# EAGLE board power electronicsV3.1 (EAGLE 9.6.2)
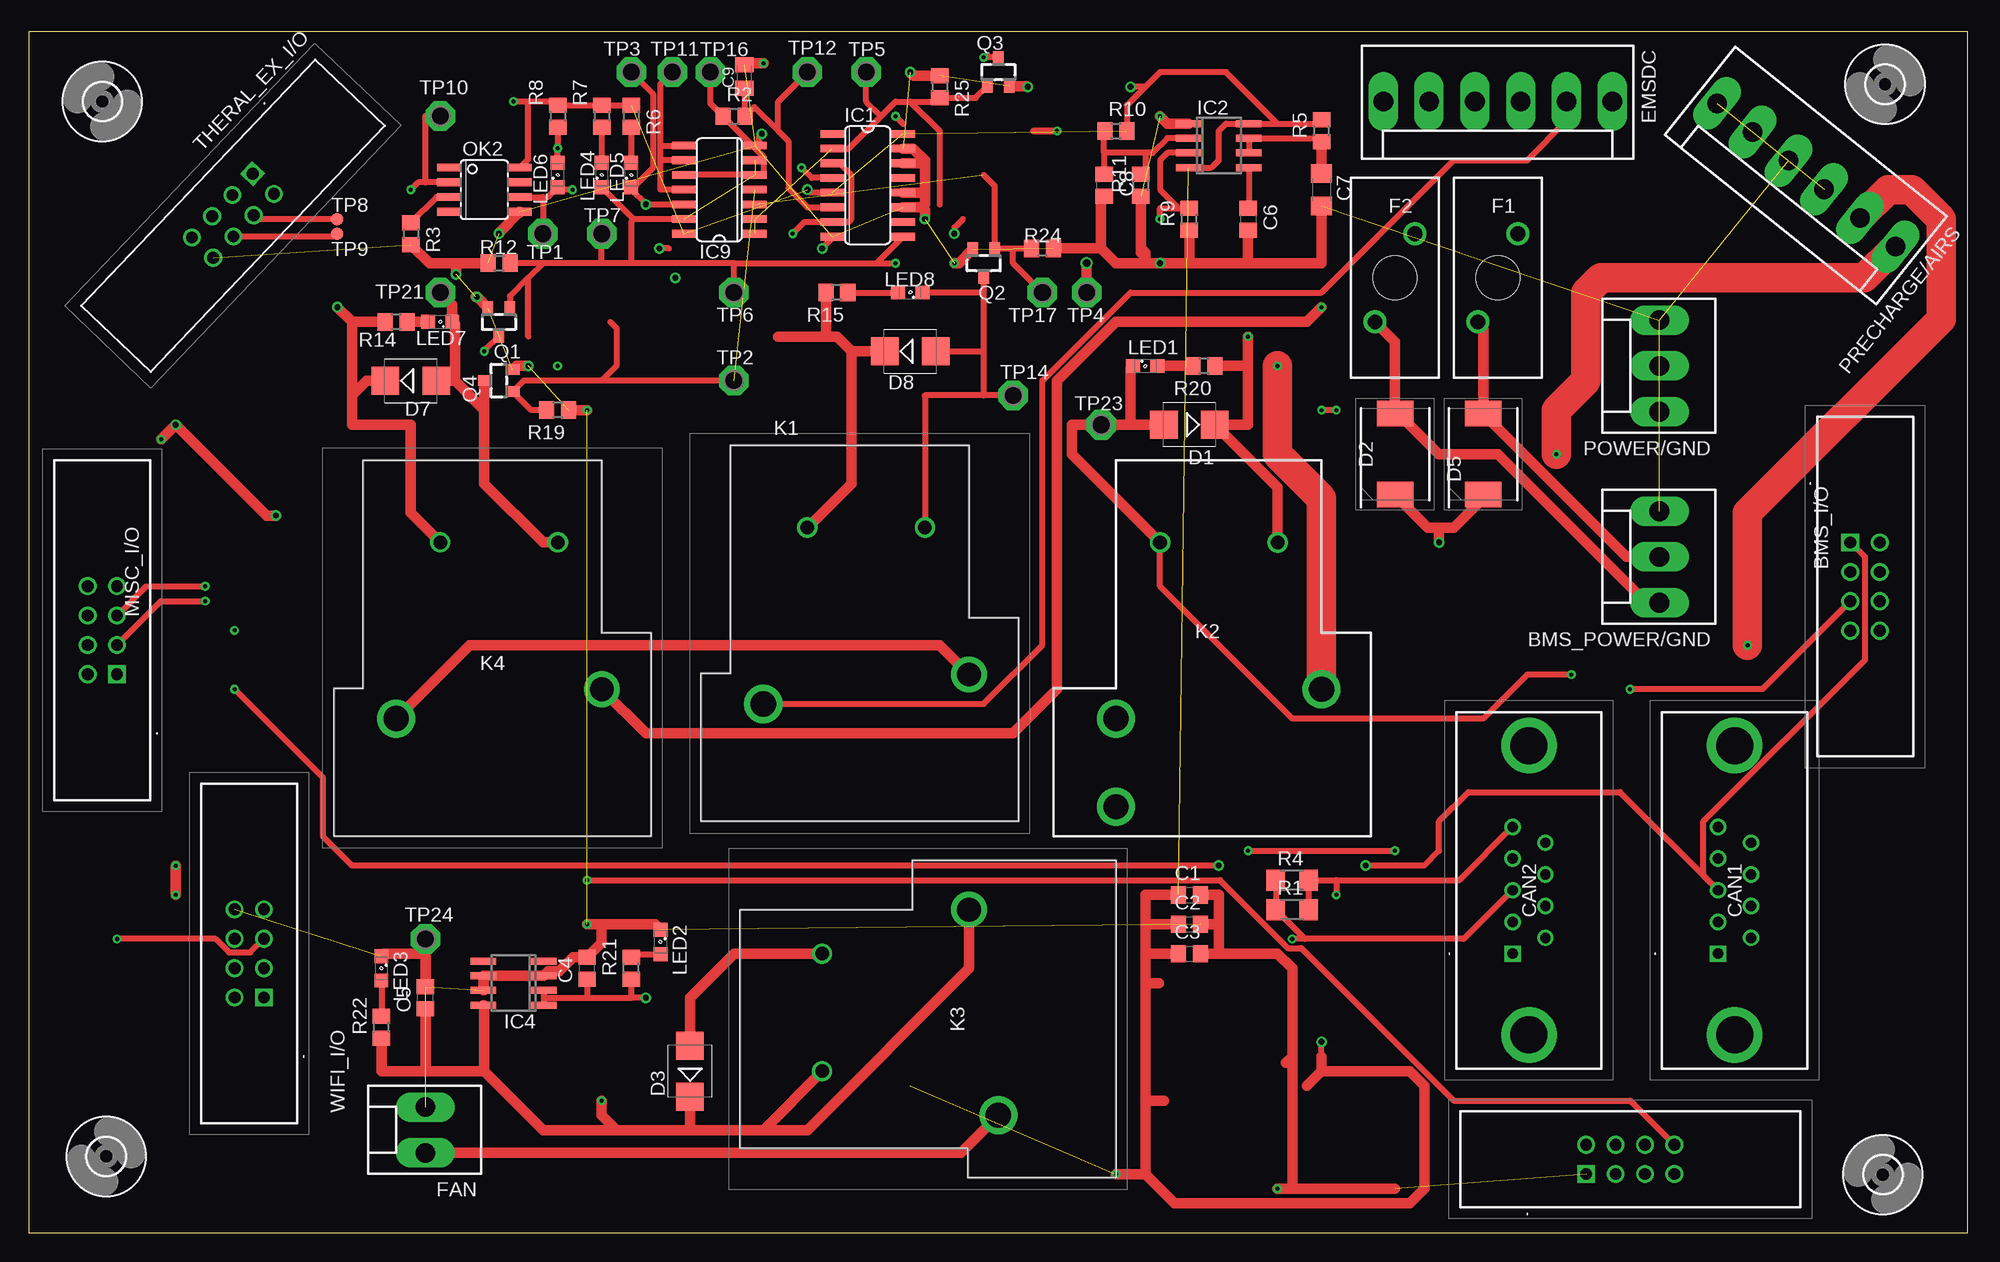
[diagram p0: board, top side]
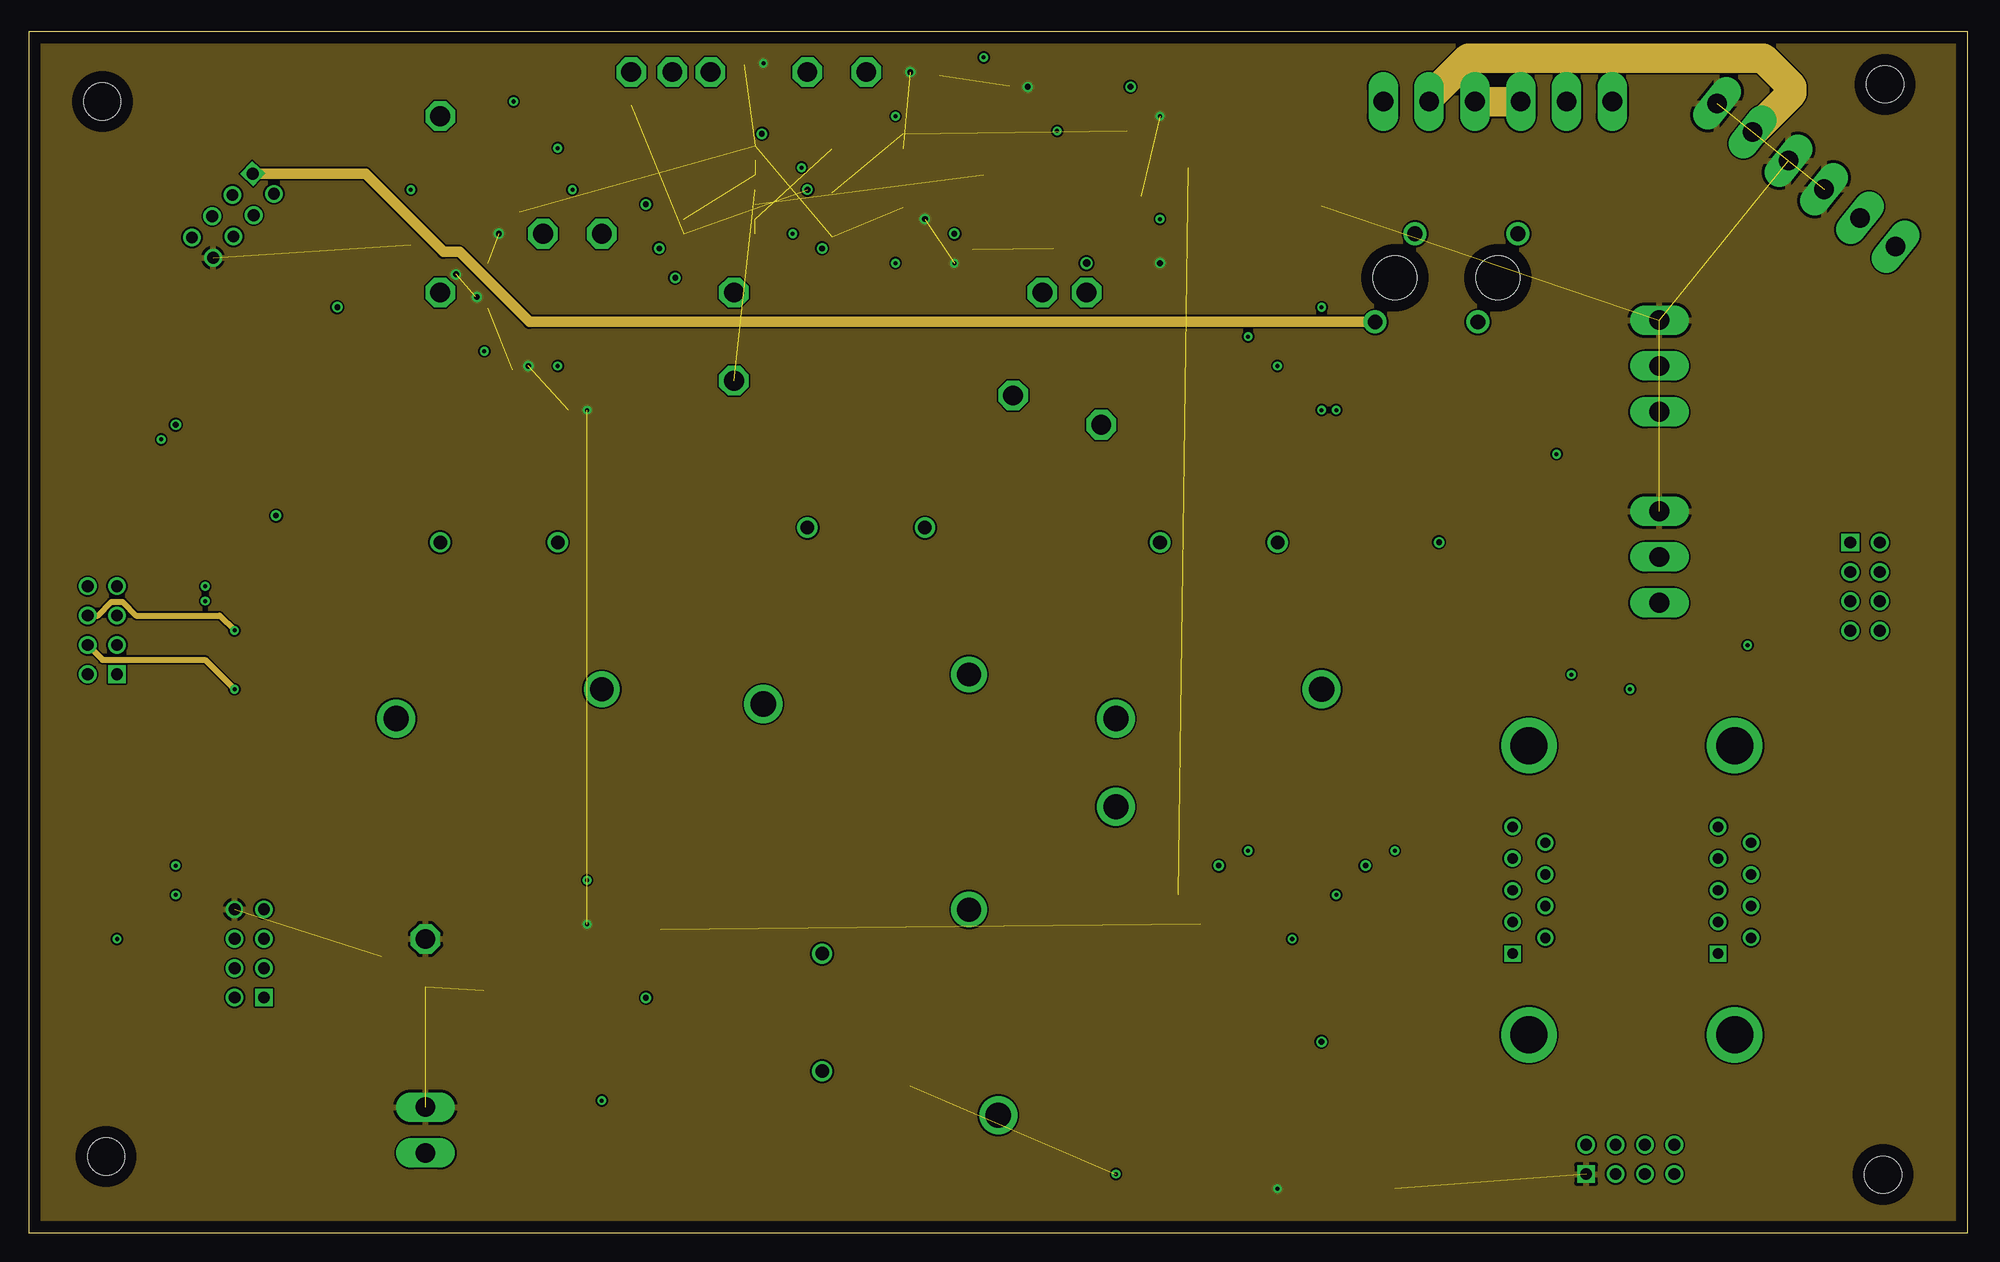
[diagram p1: board, inner layer Route2]
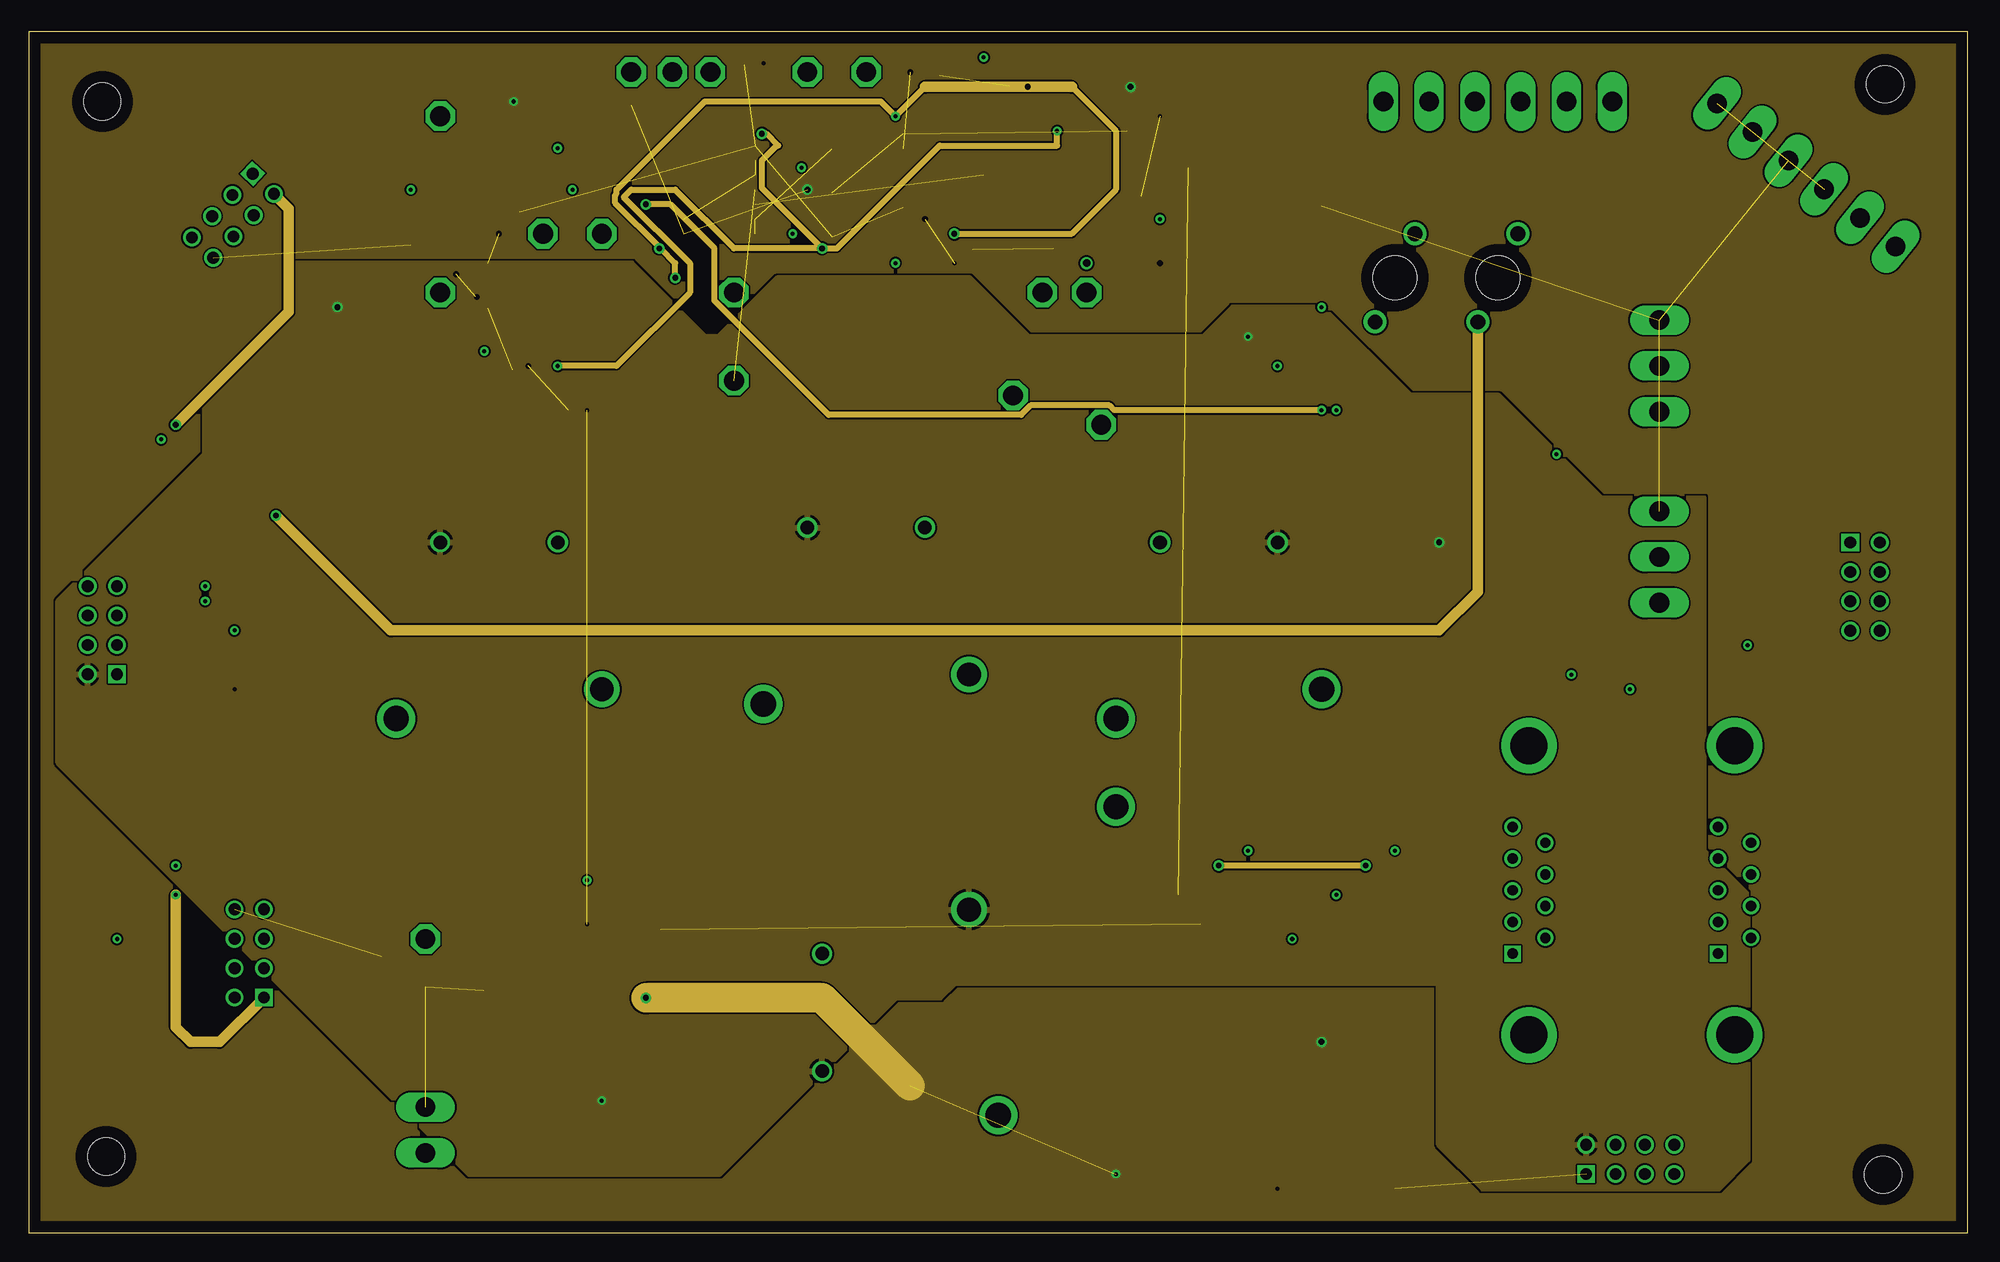
[diagram p2: board, inner layer Route15]
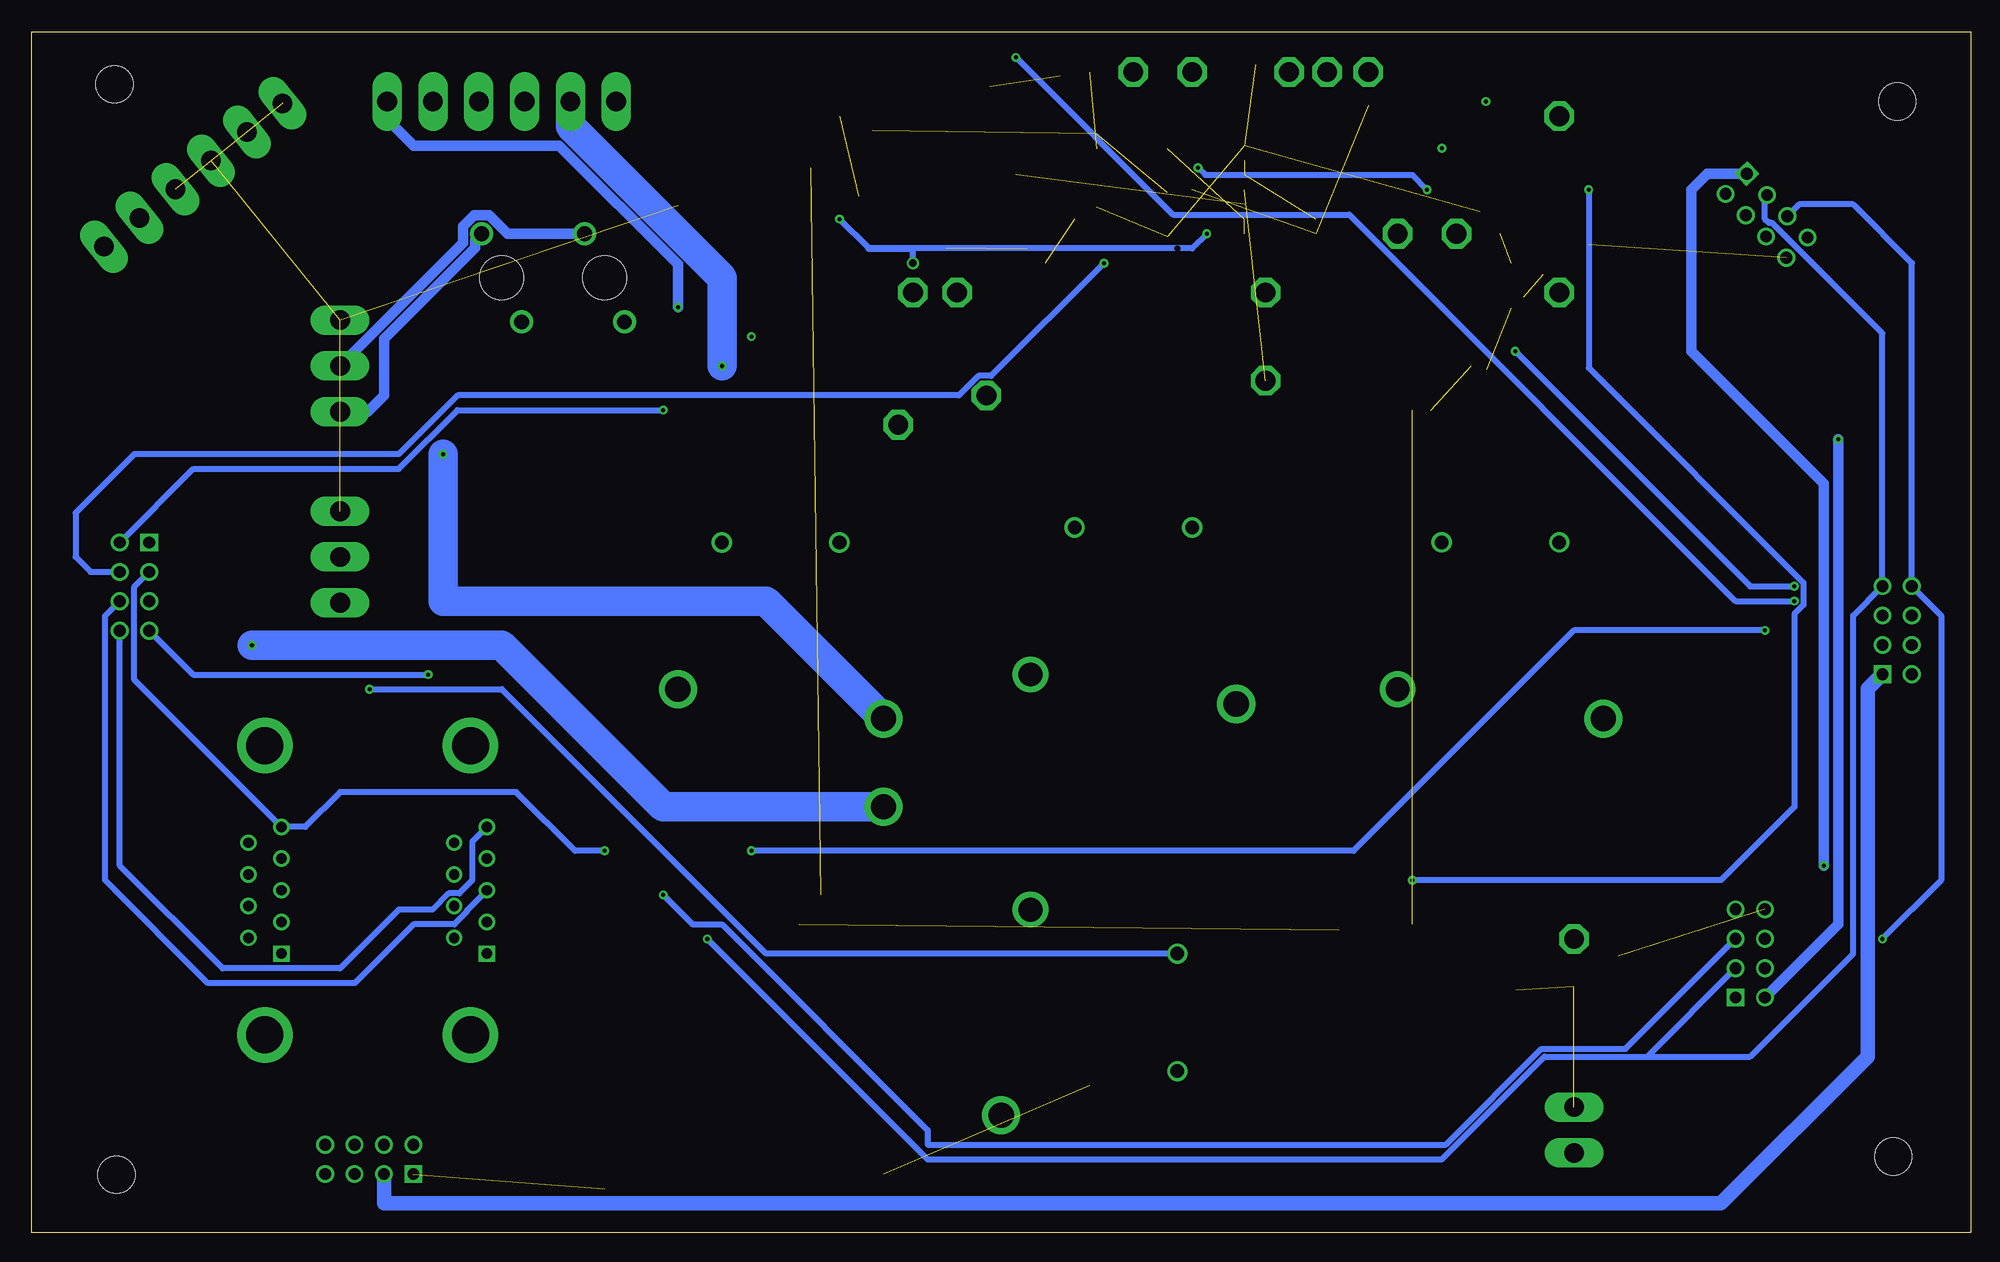
[diagram p3: board, bottom side, seen from below]

Size 167.62 x 103.81 mm. Coordinates in mm from the lower left corner, seen from the top.
Outline: 0,0 167.62,0 167.62,103.81 0,103.81 0,0
Copper layers ([2:[15:1+2*15+16]]): Top 0.035mm / dielectric 1.5mm / Route2 0.035mm / dielectric 0.15mm / Route15 0.035mm / dielectric 0.2mm / Bottom 0.035mm
Design rules "default *": minimum track width 6mil, minimum drill 0.35mm, track to track 6mil, track to pad 6mil, pad to pad 6mil, via to via 6mil, smd to smd 6mil, copper to edge 40mil, drill to drill 6mil, minimum pad ring 10mil, minimum via ring 8mil, stop-mask expansion 4mil, vias tented up to drill 0mil, thermal gap 10mil
Net classes: 0 default: width 0.508 mm; 1 GND: width 0.889 mm; 2 EMSDC: width 2.54 mm; 3 power: width 0.889 mm

## Footprints (pad centres in the part's own frame; a part is rotated, then mirrored left to right if it is on the bottom)
T816108A1S102CEU = drill 1.02 pad 1.53 square: 1 5.1,0 | drill 1.02 pad 1.53: 2 5.1,2.54; 3 7.64,0; 4 7.64,2.54; 5 10.18,0; 6 10.18,2.54; 7 12.72,0; 8 12.72,2.54
KK-156-3 = drill 1.7 pad 2.184 long: 1 -3.96,0; 2 0,0; 3 3.96,0
C0805 = smd 1.3 x 1.5: 1 -0.95,0; 2 0.95,0
C1206 = smd 1.6 x 1.8: 1 -1.4,0; 2 1.4,0
C0805K = smd 1.3 x 1.6: 1 -1,0; 2 1,0
LD09P24A4GV00LF = drill 0.9 pad 1.4 square: 1 0,0 | drill 0.9 pad 1.4: 2 2.74,0; 3 5.48,0; 4 8.22,0; 5 10.96,0; 6 1.37,-2.84; 7 4.11,-2.84; 8 6.85,-2.84; 9 9.59,-2.84 | drill 3.2 pad 4.8: MH1 -7.015,-1.42; MH2 17.975,-1.42
SMB = smd 2.4 x 2.4: A 2.2,0; C -2.2,0
DIOM7959X262N = smd 2.2 x 3.15: 1 -3.5,0; 2 3.5,0
KK-156-6 = drill 1.7 pad 2.184 long: 1 -9.9,0; 2 -5.94,0; 3 -1.98,0; 4 1.98,0; 5 5.94,0; 6 9.9,0
01530008 = drill 1.27 pad 2: 1 1.727,3.81; 2 -1.727,-3.81 | hole 3.785: 0,0
KK-156-2 = drill 1.7 pad 2.184 long: 1 -1.98,0; 2 1.98,0
3,2 = hole 3.2: 0,0
SO16 = smd 0.66 x 2.032: 1 -4.445,-3.073; 2 -3.175,-3.073; 3 -1.905,-3.073; 4 -0.635,-3.073; 5 0.635,-3.073; 6 1.905,-3.073; 7 3.175,-3.073; 8 4.445,-3.073; 9 4.445,3.073; 10 3.175,3.073; 11 1.905,3.073; 12 0.635,3.073; 13 -0.635,3.073; 14 -1.905,3.073; 15 -3.175,3.073; 16 -4.445,3.073
SO08 = smd 0.6 x 2.2: 1 -1.905,-2.6; 2 -0.635,-2.6; 3 0.635,-2.6; 4 1.905,-2.6; 5 1.905,2.6; 6 0.635,2.6; 7 -0.635,2.6; 8 -1.905,2.6
SOIC8 = smd 0.6 x 2.2: 1 -1.905,-2.6; 2 -0.635,-2.6; 3 0.635,-2.6; 4 1.905,-2.6; 5 1.905,2.6; 6 0.635,2.6; 7 -0.635,2.6; 8 -1.905,2.6
SO14 = smd 0.66 x 2.032: 1 -3.81,-3.073; 2 -2.54,-3.073; 3 -1.27,-3.073; 4 0,-3.073; 5 1.27,-3.073; 6 2.54,-3.073; 7 3.81,-3.073; 8 3.81,3.073; 9 2.54,3.073; 10 1.27,3.073; 11 0,3.073; 12 -1.27,3.073; 13 -2.54,3.073; 14 -3.81,3.073
T9AS1D1248T9A = drill 1.17 pad 1.755: 1 0,0; 2 -10.16,0 | drill 2.06 pad 3.09: 3 -13.97,12.7 | drill 2.19 pad 3.3: 4 3.81,15.24
T9AS1D12 = drill 2.19 pad 3.29: 1 -8.89,12.7; 2 8.89,15.24; 3 8.89,22.86 | drill 1.17 pad 1.77: 4 -5.08,0; 5 5.08,0
SML0805 = smd 1.2 x 1.2: A 1.05,0; C -1.05,0
SOIC08 = smd 0.66 x 2.032: 1 -1.905,-3.073; 2 -0.635,-3.073; 3 0.635,-3.073; 4 1.905,-3.073; 5 1.905,3.073; 6 0.635,3.073; 7 -0.635,3.073; 8 -1.905,3.073
SOT23 = smd 0.9 x 1.2: 1 -0.95,-1.2; 2 0.95,-1.2; 3 0,1.2
R1206 = smd 1.6 x 1.803: 1 -1.422,0; 2 1.422,0
R0805 = smd 1.3 x 1.5: 1 -0.95,0; 2 0.95,0
P1-17 = drill 1.702 pad 2.54 octagon: TP 0,0
TP11R = smd 1.1 x 1.1: TP 0,0

## Placement (x,y rotation side)
BMS_I/O  T816108A1S102CEU  [T816108A1S102CEU]  157.48,64.77 270 top
BMS_POWER/GND  [KK-156-3]  140.97,58.42 90 top
C1  0.1uF  [C0805]  100.33,29.21 0 top
C2  0.1uF  [C0805]  100.33,26.67 0 top
C3  0.1uF  [C0805]  100.33,24.13 0 top
C4  3.3uF  [C0805]  48.26,22.86 90 top
C5  1uF  [C0805]  34.29,20.32 90 top
C6  0.1uF  [C0805]  105.41,87.63 270 top
C7  22uF  [C1206]  111.76,90.17 270 top
C8  10uF  [C0805]  92.96,90.55 270 top
C9  DNP  [C0805K]  61.85,99.95 90 top
CAN1  LD09P24A4GV00LF  [LD09P24A4GV00LF]  146.05,24.13 90 top
CAN2  LD09P24A4GV00LF  [LD09P24A4GV00LF]  128.27,24.13 90 top
D1  ES2D  [SMB]  100.33,69.85 180 top
D2  VS-30BQ100-M3_9AT  [DIOM7959X262N]  118.11,67.31 90 top
D3  ES2D  [SMB]  57.15,13.97 90 top
D5  VS-30BQ100-M3_9AT  [DIOM7959X262N]  125.73,67.31 90 top
D7  ES2D  [SMB]  33.02,73.66 0 top
D8  ES2D  [SMB]  76.2,76.2 0 top
EMSDC  [KK-156-6]  127,97.79 180 top
F1  01530008Z  [01530008]  127,82.55 180 top
F2  01530008Z  [01530008]  118.11,82.55 180 top
FAN  [KK-156-2]  34.29,8.89 90 top
H1  MOUNT-HOLE3.2  [3,2]  6.35,97.79 90 top
H2  MOUNT-HOLE3.2  [3,2]  6.68,6.6 0 top
H3  MOUNT-HOLE3.2  [3,2]  160.48,99.28 0 top
H4  MOUNT-HOLE3.2  [3,2]  160.3,5.04 90 top
IC1  4043D  [SO16]  72.52,90.55 270 top
IC2  SE555D  [SO08]  102.87,93.98 270 top
IC4  [SOIC8]  41.91,21.59 90 top
IC9  4011D  [SO14]  59.69,90.17 90 top
ISOMETER_I/O  T816108A1S102CEU  [T816108A1S102CEU]  129.54,5.08 0 top
K1  T9AS1D12-48=T9A  [T9AS1D1248T9A]  67.31,60.96 180 top
K2  T9AS5D12-12=T9A  [T9AS1D12]  102.87,59.69 180 top
K3  T9AS1D12-48=T9A  [T9AS1D1248T9A]  68.58,13.97 270 top
K4  T9AS1D12-48=T9A  [T9AS1D1248T9A]  35.56,59.69 180 top
LED1  [SML0805]  96.52,74.93 0 top
LED2  [SML0805]  54.61,25.15 270 top
LED3  [SML0805]  30.48,22.86 270 top
LED4  [SML0805]  49.53,91.44 90 top
LED5  [SML0805]  52.07,91.44 90 top
LED6  [SML0805]  45.72,91.44 90 top
LED7  [SML0805]  35.56,78.74 180 top
LED8  [SML0805]  76.2,81.28 180 top
MISC_I/O  T816108A1S102CEU  [T816108A1S102CEU]  7.62,43.18 90 top
OK2  HCPL0453  [SOIC08]  39.37,90.17 270 top
POWER/GND  [KK-156-3]  140.97,74.93 90 top
PRECHARGE/AIRS  [KK-156-6]  153.67,91.44 141.3 top
Q1  BSS138  [SOT23]  40.64,78.74 180 top
Q2  BSS138  [SOT23]  82.55,83.82 180 top
Q3  BSS138  [SOT23]  83.82,100.33 0 top
Q4  BSS138  [SOT23]  40.64,73.66 90 top
R1  120  [R1206]  109.22,27.94 0 top
R2  0R  [R0805]  60.96,96.52 0 top
R3  2.2K  [R0805]  33.02,86.36 270 top
R4  120  [R1206]  109.22,30.48 0 top
R5  100K  [R0805]  111.76,95.25 90 top
R6  330  [R0805]  52.07,96.52 270 top
R7  330  [R0805]  49.53,96.52 270 top
R8  330  [R0805]  45.72,96.52 270 top
R9  10K  [R0805]  100.33,87.63 90 top
R10  200K  [R0805]  93.98,95.25 0 top
R11  510K  [R0805]  96.14,90.55 90 top
R12  [R0805]  40.64,83.82 0 top
R14  [R0805]  31.75,78.74 180 top
R15  [R0805]  69.85,81.28 180 top
R19  [R0805]  45.72,71.12 180 top
R20  1.2K  [R0805]  101.6,74.93 180 top
R21  330  [R0805]  52.07,22.86 90 top
R22  1.2K  [R0805]  30.48,17.78 90 top
R24  [R0805]  87.63,85.09 180 top
R25  [R0805]  78.74,99.06 270 top
THERAL_EX_I/O  T816108A1S102CEU  [T816108A1S102CEU]  22.86,95.25 226.4 top
TP1  TPPAD1-17  [P1-17]  44.45,86.36 0 top
TP2  TPPAD1-17  [P1-17]  60.96,73.66 0 top
TP3  TPPAD1-17  [P1-17]  52.07,100.33 0 top
TP4  TPPAD1-17  [P1-17]  91.44,81.28 0 top
TP5  TPPAD1-17  [P1-17]  72.39,100.33 0 top
TP6  TPPAD1-17  [P1-17]  60.96,81.28 0 top
TP7  TPPAD1-17  [P1-17]  49.53,86.36 0 top
TP8  TPSTP11R  [TP11R]  26.67,87.63 0 top
TP9  TPSTP11R  [TP11R]  26.67,86.36 0 top
TP10  TPPAD1-17  [P1-17]  35.56,96.52 0 top
TP11  TPPAD1-17  [P1-17]  55.63,100.33 0 top
TP12  TPPAD1-17  [P1-17]  67.31,100.33 0 top
TP14  TPPAD1-17  [P1-17]  85.09,72.39 0 top
TP16  TPPAD1-17  [P1-17]  58.93,100.33 0 top
TP17  TPPAD1-17  [P1-17]  87.63,81.28 0 top
TP21  TPPAD1-17  [P1-17]  35.56,81.28 0 top
TP23  TPPAD1-17  [P1-17]  92.71,69.85 0 top
TP24  TPPAD1-17  [P1-17]  34.29,25.4 0 top
WIFI_I/O  T816108A1S102CEU  [T816108A1S102CEU]  20.32,15.24 90 top

## Library data of the parts
BMS_I/O ISOMETER_I/O MISC_I/O THERAL_EX_I/O WIFI_I/O = T816108A1S102CEU; DESCRIPTION: Amphenol T816 Series, 2.54mm Pitch 8 Way 2 Row Straight PCB Header, Solder Termination, 3A; HEIGHT: 27.2mm; MANUFACTURER_NAME: Amphenol; MANUFACTURER_PART_NUMBER: T816108A1S102CEU
BMS_POWER/GND EMSDC FAN POWER/GND PRECHARGE/AIRS = con-molex; MF: MOLEX; OC_FARNELL: unknown; OC_NEWARK: unknown
C1-C9 = rcl; SPICEPREFIX: C
CAN1 CAN2 = LD09P24A4GV00LF; ARROW_PART_NUMBER: LD09P24A4GV00LF; ARROW_PRICE-STOCK: https://www.arrow.com/en/products/ld09p24a4gv00lf/amphenol-fci?region=nac; DESCRIPTION: Amphenol FCI LD Series, 9 Way Plug-In Mount D-sub Connector Plug, 2.74mm Pitch, with Screw; HEIGHT: 12.15mm; MANUFACTURER_NAME: Amphenol Communication Solutions; MANUFACTURER_PART_NUMBER: LD09P24A4GV00LF; MOUSER_PART_NUMBER: 649-LD09P24A4GV00LF; MOUSER_PRICE-STOCK: https://www.mouser.co.uk/ProductDetail/Amphenol-FCI/LD09P24A4GV00LF?qs=tZOhSuJQg1nfkziarphghA%3D%3D
D1 D3 D7 D8 = diode
D2 D5 = SamacSys_Parts; DESCRIPTION: Vishay VS-30BQ100-M3/9AT SMT Schottky Diode, 100V 3A, 2-Pin DO-214AB; HEIGHT: 2.62mm; MANUFACTURER_NAME: Vishay; MANUFACTURER_PART_NUMBER: VS-30BQ100-M3/9AT; MOUSER_PART_NUMBER: 78-VS-30BQ100-M39AT; MOUSER_PRICE-STOCK: https://www.mouser.com/Search/Refine.aspx?Keyword=78-VS-30BQ100-M39AT
F1 F2 = SamacSys_Parts; ALLIED_NUMBER: 70184304; DESCRIPTION: Mini fuseholder,15A 32V Littelfuse 15A PCB Mount Fuse Holder Automotive Fuse, 32 V; HEIGHT: mm; MANUFACTURER_NAME: LITTELFUSE; MANUFACTURER_PART_NUMBER: 01530008Z; RS_PART_NUMBER: 3607317; RS_PRICE-STOCK: https://uk.rs-online.com/web/p/products/3607317
H1-H4 = holes
IC1 IC9 = 40xx
IC2 = linear
IC4 = linear-technology; MPN: LT1129CS8-5#PBF; OC_FARNELL: 1273576; OC_NEWARK: 57M2078
K1 K3 K4 = SamacSys_Parts; DESCRIPTION: SPST-NO PCB Mount Non-Latching Relay Through Hole, 48V dc; HEIGHT: 20.4mm; MANUFACTURER_NAME: TE Connectivity; MANUFACTURER_PART_NUMBER: T9AS1D12-48=T9A; RS_PART_NUMBER: 6802534P; RS_PRICE-STOCK: http://uk.rs-online.com/web/p/products/6802534P
K2 = SamacSys_Parts; ALLIED_NUMBER: R1111589; DESCRIPTION: PCB Relay SPDT 30A 12Vdc,thru hole SPDT PCB Mount Non-Latching Relay Through Hole, 12V dc; HEIGHT: mm; MANUFACTURER_NAME: TE Connectivity; MANUFACTURER_PART_NUMBER: T9AS5D12-12=T9A; RS_PART_NUMBER: 6802528; RS_PRICE-STOCK: https://uk.rs-online.com/web/p/products/6802528
LED1-LED8 = led
OK2 = optocoupler; MF: AGILENT TECHNOLOGIES; MPN: HCPL-0453-000E; OC_FARNELL: 1505123; OC_NEWARK: 88H7766
Q1-Q4 = m-pad-2.1
R1-R12 R14 R15 R19-R22 R24 R25 = rcl; SPICEPREFIX: R
TP1-TP12 TP14 TP16 TP17 TP21 TP23 TP24 = testpad

## Nets
+3V3: C1.1 C2.1 C3.1 C4.1 IC1.5 IC1.16 IC2.4 IC2.8 IC4.1 IC4.2 IC9.14 OK2.8 R5.2 R6.1 R7.1 R8.1 R10.2 R21.1
+12V [power]: C5.1 D1.C D2.1 D3.C D5.1 D7.C D8.C IC4.8 ISOMETER_I/O.2 K1.1 K2.4 K3.1 K3.3 K4.1 MISC_I/O.2 R14.2 R15.2 R20.1 R22.1
AMS_LED-: MISC_I/O.5 Q1.3
CAN1_H: BMS_I/O.1 CAN1.3 MISC_I/O.4
CAN1_L: BMS_I/O.3 CAN1.5 MISC_I/O.6
CAN2_H: BMS_I/O.6 CAN2.3 MISC_I/O.7 R1.1 R4.1 THERAL_EX_I/O.3 WIFI_I/O.3
CAN2_L: BMS_I/O.8 CAN2.5 MISC_I/O.8 R1.2 R4.2 THERAL_EX_I/O.5 WIFI_I/O.5
CHARGE_POWER [power]: BMS_POWER/GND.2 D5.2 F1.1 THERAL_EX_I/O.2 WIFI_I/O.2
CHARGE_SAFE: BMS_I/O.2 IC9.12 LED5.C TP3.TP
CHASSIS_GND [GND]: ISOMETER_I/O.3 MISC_I/O.1
DISCHARGE_ENABLE: BMS_I/O.4 IC1.9 IC9.5 IC9.6 IC9.13 LED4.C Q1.1 R12.2 TP6.TP TP7.TP
FAN+ [power]: FAN.1 K3.4
FAN_ENABLE: BMS_I/O.5 D3.A K3.2
GND [GND]: BMS_POWER/GND.3 C1.2 C2.2 C3.2 C4.2 C5.2 C6.2 C7.2 C8.2 C9.2 FAN.2 IC1.8 IC1.11 IC1.12 IC1.14 IC1.15 IC2.1 IC4.3 IC4.6 IC4.7 IC9.7 ISOMETER_I/O.1 LED2.C LED3.C OK2.5 POWER/GND.3 PRECHARGE/AIRS.3 PRECHARGE/AIRS.4 PRECHARGE/AIRS.6 Q1.2 Q2.2 Q3.2 Q4.2 R3.2 R9.1 R11.1 R12.1 R19.1 R24.1 R25.1 THERAL_EX_I/O.8 TP24.TP WIFI_I/O.8
HIGHEST_TEMP: THERAL_EX_I/O.4 TP8.TP
IMD_COIL_OUT: D8.A K1.2 LED8.C Q2.3 TP14.TP
IMD_LED-: MISC_I/O.3 Q3.3
LOWEST_TEMP: THERAL_EX_I/O.6 TP9.TP
M_HS: ISOMETER_I/O.5
N$1: IC9.10 R2.1 TP16.TP
N$2 [power]: F2.2 POWER/GND.2
N$3 [EMSDC]: K2.2 PRECHARGE/AIRS.1
N$4 [power]: F1.2 POWER/GND.1
N$5: IC1.4 LED6.C OK2.6 TP1.TP
N$6: IC9.8 IC9.9 IC9.11 TP11.TP
N$7: OK2.3 R3.1
N$8: IC9.3 Q2.1 R24.2 TP17.TP
N$9: IC1.2 IC9.1 IC9.2 Q3.1 R25.2 TP5.TP
N$10: C9.1 IC1.6 R2.2 TP12.TP
N$11 [EMSDC]: EMSDC.5 K2.1 PRECHARGE/AIRS.5
N$12 [EMSDC]: K2.3 PRECHARGE/AIRS.2
N$13 [power]: EMSDC.1 K4.3
N$14: EMSDC.2 K1.4
N$15 [GND]: D7.A K4.2 LED7.C Q4.3 TP21.TP
N$16: IC9.4 Q4.1 R19.2 TP2.TP
N$17: C7.1 IC2.6 IC2.7 R5.1
N$18: LED7.A R14.1
N$19 [EMSDC]: EMSDC.3 EMSDC.4
N$20: LED8.A R15.1
N$21 [GND]: K1.3 K4.4
N$22: LED1.A R20.2
N$23: LED2.A R21.2
N$24: LED3.A R22.2
N$25: LED4.A R7.2
N$26: LED5.A R6.2
N$27: LED6.A R8.2
N$28: C8.1 IC2.2 R10.1 R11.2
N$32: C6.1 IC2.5
OK_HS: ISOMETER_I/O.8 OK2.2 TP10.TP
PRECHARGE_SELECT: BMS_I/O.7 D1.A K2.5 LED1.C TP23.TP
READY_POWER [power]: BMS_POWER/GND.1 D2.2 F2.1 THERAL_EX_I/O.1 WIFI_I/O.1
STARTUP_RESET: IC1.3 IC1.7 IC2.3 R9.2 TP4.TP

## Tracks (layer width: path | path; a pad name or v marks a point on that pad's centre or on a via)
+3V3  (via drill 0.35, 0.35 layers 1-15, 0.5 pad 0.8 layers 1-15)  (6 unrouted)
  Top 0.508: IC4.2 44.51,20.32 | 44.51,20.32 IC4.1 | 44.51,20.32 48.26,20.32 | 48.26,20.32 52.07,20.32 | R21.1 52.07,20.32 | C4.1 48.26,20.32 | IC2.4 102.23,92.08 102.87,92.71 102.87,95.25 103.5,95.89 IC2.8 107.95,95.89 | 107.95,95.89 111.44,95.89 R5.2 | 107.95,95.89 103.5,100.33 97.79,100.33 96.52,99.06 | 96.52,99.06 94.93,97.47 R10.2 | OK2.8 43.18,92.81 43.18,97.79 | 43.18,97.79 45.4,97.79 R8.1 R7.1 R6.1 | 43.18,97.79 v41.91,97.79 | 111.76,15.24 v111.76,16.51 | v53.34,20.32 52.07,20.32 | IC1.5 67.56,89.92 v67.31,90.17 | 96.52,99.06 v95.25,99.06
  Top 0.889: C1.1 96.52,29.21 96.52,26.67 | 96.52,26.67 96.52,24.13 | 96.52,24.13 96.52,21.59 | 96.52,21.59 96.52,11.43 | 98.15,11.43 96.52,11.43 | C2.1 96.52,26.67 | C3.1 96.52,24.13 | 96.52,11.43 96.52,5.08 | 111.76,13.97 119.38,13.97 120.65,12.7 120.65,3.81 119.38,2.54 99.06,2.54 96.52,5.08 | 110.49,12.7 111.76,13.97 | 111.76,13.97 111.76,15.24 | 97.69,21.59 96.52,21.59 | 96.52,5.08 v93.98,5.08
  Route15 2.54: 76.2,12.7 68.58,20.32 v53.34,20.32
  pour Route15 (rank 2): 0,104.14 165.1,104.14 167.64,101.6 167.64,0 1.27,0 0,-1.27
+12V  (via drill 0.35, 0.35 layers 1-15, 0.5 pad 0.8 layers 1-15)
  Top 0.889: K1.1 71.12,64.77 71.12,76.2 | 71.12,76.2 69.85,77.47 68.58,77.47 | 68.58,77.47 64.77,77.47 | R15.2 68.9,77.79 68.58,77.47 | D8.C 71.12,76.2 | K4.1 33.02,62.23 33.02,69.85 27.94,69.85 27.94,72.39 | 27.94,72.39 29.21,73.66 D7.C | 27.94,72.39 27.94,78.74 | R14.2 27.94,78.74 | K2.4 107.95,64.43 D1.C 105.41,69.85 105.41,74.93 | 105.41,74.93 v105.41,77.47 | R20.1 105.41,74.93 | R22.1 30.48,13.97 34.29,13.97 | 34.29,13.97 C5.1 | 34.29,13.97 39.37,13.97 | 39.37,13.97 39.37,19.62 IC4.8 | 39.37,13.97 44.45,8.89 50.8,8.89 | 50.8,8.89 57.15,8.89 | 57.15,8.89 63.5,8.89 | 63.5,8.89 K3.1 | D3.C 57.15,8.89 | 63.5,8.89 67.31,8.89 81.28,22.86 K3.3 | 50.8,8.89 49.53,10.16 v49.53,11.43 | D2.1 120.96,60.96 121.92,60.96 | 121.92,60.96 123.19,60.96 125.73,63.5 D5.1 | 27.94,78.74 v26.67,80.01 | 121.92,60.96 v121.92,59.69
  pour Route15: 59.69,5.08 38.1,5.08 2.54,40.64 2.54,54.61 15.24,67.31 15.24,76.2 22.86,83.82 52.07,83.82 58.42,77.47 59.69,77.47 64.77,82.55 81.28,82.55 86.36,77.47 101.6,77.47 104.14,80.01 111.76,80.01 119.38,72.39 127,72.39 135.89,63.5 144.78,63.5 144.78,33.02 148.59,29.21 148.59,6.35 146.05,3.81 125.73,3.81 121.92,7.62 121.92,21.59 80.01,21.59 78.74,20.32 74.93,20.32
AMS_LED-  (via drill 0.35)
  Top 0.508: Q1.3 39.37,76.27 v39.37,76.2 | MISC_I/O.5 10.14,55.88 v15.24,55.88
  Bottom 0.508: v39.37,76.2 19.05,55.88 v15.24,55.88
CAN1_H  (via drill 0.35 layers 1-2, 0.5 pad 0.8 layers 1-15)
  Top 0.508: BMS_I/O.1 157.5,59.67 158.75,58.42 158.75,49.53 144.78,35.56 144.78,30.88 CAN1.3 137.56,38.1 124.46,38.1 121.92,35.56 121.92,33.02 120.65,31.75 v115.57,31.75 | v17.78,46.99 25.4,39.37 25.4,34.29 27.94,31.75 v102.87,31.75
  Route2 0.508: MISC_I/O.4 6.37,49.53 15.24,49.53 v17.78,46.99
  Route15 0.508: v115.57,31.75 v102.87,31.75
CAN1_L  (via drill 0.35)
  Top 0.508: v105.41,33.02 v118.11,33.02
  Route2 0.508: v17.78,52.07 16.49,53.36 9.28,53.36 8.11,54.53 7.13,54.53 5.96,53.36 MISC_I/O.6
  Bottom 0.508: BMS_I/O.3 158.75,55.86 158.75,47.79 CAN1.5 143.98,35.09 140.97,38.1 125.73,38.1 120.65,33.02 v118.11,33.02 | v17.78,52.07 34.29,52.07 53.34,33.02 v105.41,33.02
CAN2_H  (via drill 0.35)
  Top 0.508: R4.1 R1.1 110.34,25.4 | CAN2.3 124.06,25.4 110.34,25.4 | 110.34,25.4 v109.22,25.4
  Bottom 0.508: v109.22,25.4 90.17,6.35 45.72,6.35 36.83,15.24 27.94,15.24 | 27.94,15.24 20.32,22.86 WIFI_I/O.3 | 27.94,15.24 19.05,15.24 10.16,24.13 10.16,53.36 MISC_I/O.7 7.62,77.74 17.17,87.29 17.44,87.29 17.78,87.63 17.78,89.53 THERAL_EX_I/O.3 | CAN2.3 130,27.88 130,27.78 131.11,26.67 134.62,26.67 139.7,21.59 152.4,21.59 161.29,30.48 161.29,53.32 BMS_I/O.6
CAN2_L  (via drill 0.35)
  Top 0.508: R1.2 R4.2 113.03,30.48 | CAN2.5 123.66,30.48 113.03,30.48 | 113.03,30.48 v113.03,29.21 | v7.62,25.4 16.14,25.4 17.3,24.25 19.15,24.25 WIFI_I/O.5
  Bottom 0.508: v113.03,29.21 110.49,26.67 107.95,26.67 90.17,8.89 90.17,7.62 45.38,7.62 37.1,15.9 29.84,15.9 WIFI_I/O.5 | v7.62,25.4 2.54,30.48 2.54,53.36 MISC_I/O.8 5.08,83.82 10.16,88.9 14.82,88.9 THERAL_EX_I/O.5 | CAN2.5 129.54,33.82 129.54,30.48 130.67,29.35 131.57,29.35 132.98,27.94 135.89,27.94 140.97,22.86 151.13,22.86 160.02,31.75 BMS_I/O.8
CHARGE_POWER  (via drill 0.35, 0.5 pad 0.8 layers 1-15)
  Top 0.889: F1.1 125.73,78.28 D5.2 138.12,58.42 BMS_POWER/GND.2 | v11.43,68.58 v12.7,69.85 20.55,62 v21.36,62
  Route15 0.889: F1.1 125.27,55.42 121.92,52.07 31.3,52.07 v21.36,62 | THERAL_EX_I/O.2 22.45,88.53 22.45,79.6 v12.7,69.85
  Bottom 0.889: WIFI_I/O.2 11.43,26.69 v11.43,68.58
CHARGE_SAFE  (via drill 0.35, 0.35 layers 1-15, 0.5 pad 0.8 layers 1-15)
  Top 0.508: TP3.TP 53.95,98.45 53.95,92.05 52.29,90.39 LED5.C 52.07,90.17 v53.34,88.9 IC9.12 | v113.03,71.12 v111.76,71.12
  Route15 0.508: v111.76,71.12 93.82,71.12 93.41,71.53 86.61,71.53 85.79,70.71 69.15,70.71 59.28,80.58 59.28,85.09 55.47,88.9 v53.34,88.9
  Bottom 0.508: BMS_I/O.2 153.65,66.04 135.89,66.04 130.81,71.12 v113.03,71.12
CHASSIS_GND
  Bottom 1.27: ISOMETER_I/O.3 137.16,5.06 137.16,2.54 21.59,2.54 8.89,15.24 8.89,47.01 MISC_I/O.1
DISCHARGE_ENABLE  (via drill 0.35)  (2 unrouted)
  Top 0.508: LED4.C 52.29,87.63 | IC9.13 52.29,87.63 | IC1.9 73.3,83.82 | 60.96,83.82 73.3,83.82 | 60.96,83.82 52.07,83.82 | 52.07,83.82 49.53,83.82 | 49.53,83.82 44.45,83.82 | 44.45,83.82 43.18,82.55 | 43.18,82.55 41.59,80.96 Q1.1 | 44.45,83.82 R12.2 | 43.18,77.47 43.18,82.55 | 49.53,83.82 TP7.TP | 52.29,87.63 52.07,87.41 52.07,83.82 | TP6.TP 60.96,83.82 | 73.3,83.82 v74.93,83.82
  Bottom 0.508: v74.93,83.82 84.68,74.07 85.79,74.07 87.47,72.39 130.81,72.39 135.89,67.31 158.75,67.31 163.83,62.23 163.83,58.42 162.54,57.13 BMS_I/O.4
FAN+
  Top 0.889: FAN.1 80.57,6.91 K3.4
FAN_ENABLE  (via drill 0.35)
  Top 0.508: BMS_I/O.5 149.86,46.99 v138.43,46.99
  Top 0.889: K3.2 60.96,24.13 57.15,20.32 57.15,17.78 D3.A
  Bottom 0.508: K3.2 104.14,24.13 127,46.99 v138.43,46.99
GND  (via drill 0.35 layers 1-2, 0.5 pad 0.8 layers 1-2)  (25 unrouted)
  Top 0.889: IC1.11 77.22,88.65 | 77.22,88.65 77.47,88.9 77.47,90.17 | 77.47,90.17 77.47,92.71 | 77.47,92.71 76.45,93.73 IC1.15 | IC1.14 77.22,92.46 77.47,92.71 | IC1.12 77.22,89.92 77.47,90.17 | IC4.7 IC4.6 IC4.3 44.88,22.6 45.86,22.6 47.07,23.81 C4.2 49.53,25.08 49.53,26.67 | C8.2 92.71,89.35 92.71,85.09 | 92.71,85.09 93.98,83.82 96.52,83.82 | 100.33,83.82 105.41,83.82 | 105.41,83.82 111.76,83.82 C7.2 | C6.2 105.41,83.82 | R9.1 100.33,83.82 | R11.1 96.14,85.09 | 96.14,85.09 96.14,84.71 | C1.2 102.87,29.21 102.87,26.67 | 102.87,26.67 102.87,24.13 | C2.2 102.87,26.67 | C3.2 102.87,24.13 | 102.87,24.13 107.95,24.13 109.22,22.86 109.22,15.24 | 109.22,15.24 108.69,14.71 | 109.22,3.81 109.22,15.24 | 109.22,3.81 118.11,3.81 | C5.2 34.29,24.13 | 34.29,24.13 TP24.TP | R12.1 36.83,83.82 36.8,83.79 | 109.22,3.81 v107.95,3.81 | Q1.2 v38.73,80.9 38.61,80.9 | R19.1 v48.26,71.12 | 77.22,88.65 77.47,88.39 v77.47,87.63 | R25.1 76.52,100.01 v76.2,100.33 | 84.84,99.06 Q3.2 86.29,99.13 v86.36,99.06 | 42.44,88.16 OK2.5 40.64,86.46 v40.64,86.36 | LED3.C 30.7,24.13 34.29,24.13 | 49.53,26.67 54.14,26.67 LED2.C | 49.53,26.67 v48.26,26.67 | IC2.1 98.42,95.89 v97.79,96.52 | v63.5,101.09 61.99,101.09 C9.2 | Q2.2 80.4,83.82 v80.01,83.82 | R24.1 92.71,85.09 | 96.52,83.82 v97.79,83.82 100.33,83.82 | 96.14,85.09 96.52,84.71 96.52,83.82 | v36.93,82.86 36.93,83.79 36.8,83.79 | 36.8,83.79 34.64,83.79 R3.2 | Q4.2 42.16,74.93 v43.18,74.93
  pour Route2: 0,104.14 167.64,104.14 167.64,-1.27 0,-1.27
HIGHEST_TEMP
  Top 0.508: TP8.TP 19.77,87.63 THERAL_EX_I/O.4
IMD_COIL_OUT
  Top 0.508: Q2.3 82.55,81.28 | 82.55,81.28 82.55,76.2 | 82.55,76.2 82.55,72.39 | K1.2 77.47,72.39 82.55,72.39 | D8.A 82.55,76.2 | 82.55,81.28 LED8.C | TP14.TP 82.55,72.39
IMD_LED-  (via drill 0.35)
  Top 0.508: Q3.3 83.75,101.6 v82.55,101.6 | MISC_I/O.3 11.41,54.61 v15.24,54.61
  Bottom 0.508: v82.55,101.6 68.96,88.01 53.72,88.01 20.32,54.61 v15.24,54.61
LOWEST_TEMP
  Top 0.508: THERAL_EX_I/O.6 26.44,86.13 TP9.TP
N$1
  Top 0.508: IC9.10 63.5,91.44 63.5,93.03 R2.1 58.93,97.6 TP16.TP
N$2
  Bottom 0.889: F2.2 126.47,86.36 128.07,87.96 129.39,87.96 130.32,87.02 130.32,85.58 POWER/GND.2
N$3  (via drill 0.35)
  Top 2.54: v132.08,67.31 132.08,71.12 134.62,73.66 134.62,81.28 135.89,82.55 158.7,82.55 PRECHARGE/AIRS.1
  Bottom 2.54: K2.2 104.14,54.61 132.08,54.61 v132.08,67.31
N$4
  Bottom 0.889: F1.2 129.28,85.81 129.28,85.14 137.16,77.27 137.16,72.39 138.58,70.97 POWER/GND.1
N$5  (via drill 0.35)
  Top 0.508: OK2.6 44.45,89.53 | 44.45,89.53 44.87,89.53 LED6.C 45.94,90.17 v46.99,90.17 | IC1.4 67.69,91.19 v66.8,92.08 | 44.45,89.53 TP1.TP
  Bottom 0.508: v66.8,92.08 66.17,91.44 48.26,91.44 v46.99,90.17
N$6
  Top 0.508: IC9.11 54.61,90.17 54.61,92.71 | IC9.9 54.61,92.71 | 54.61,92.71 54.61,93.98 | 54.61,93.98 IC9.8 | 54.61,93.98 54.61,99.31 TP11.TP
N$7
  Top 0.508: R3.1 35.24,89.53 OK2.3
N$8  (1 unrouted)
  Top 0.508: 82.55,91.44 83.5,90.49 Q2.1 83.57,85.09 85.09,85.09 | 85.09,85.09 R24.2 | TP17.TP 85.09,83.82 85.09,85.09
N$9  (2 unrouted)
  Top 0.508: IC1.2 70.87,93.73 73.66,96.52 | 73.66,96.52 74.93,97.79 76.2,97.79 | 76.2,97.79 78.74,95.25 78.74,90.17 78.74,88.9 | 76.2,97.79 78.42,97.79 R25.2 81.85,98.11 Q3.1 | 73.66,96.52 72.39,97.79 TP5.TP
N$10
  Top 0.508: C9.1 61.91,98.89 R2.2 62.7,97.31 64.77,95.25 | IC1.6 67.31,88.65 65.66,90.3 65.66,94.36 64.77,95.25 | 64.77,95.25 64.77,97.79 TP12.TP
N$11  (via drill 0.35)
  Top 2.54: K2.1 111.76,63.5 107.95,67.31 v107.95,74.93
  Route2 2.54: PRECHARGE/AIRS.5 152.4,98.52 152.4,99.06 149.94,101.52 124.46,101.52 121.06,98.12 EMSDC.5
  Bottom 2.54: v107.95,74.93 107.95,82.55 121.06,95.66 EMSDC.5
N$12  (via drill 0.35)
  Top 2.54: v148.59,50.8 148.59,62.23 165.33,78.97 165.33,87.63 162.79,90.17 160.75,90.17 PRECHARGE/AIRS.2
  Bottom 2.54: K2.3 113.03,36.83 127,50.8 v148.59,50.8
N$13  (via drill 0.35)
  Top 0.889: K4.3 53.34,43.18 85.09,43.18 88.9,46.99 88.9,73.66 93.98,78.74 110.49,78.74 v111.76,80.01
  Bottom 0.889: v111.76,80.01 111.76,83.72 122.02,93.98 134.62,93.98 137.16,96.52 137.16,97.79 EMSDC.1
N$14
  Top 0.508: K1.4 82.55,45.72 87.63,50.8 87.63,73.66 95.25,81.28 111.76,81.28 123.19,92.71 129.54,92.71 132.94,96.11 EMSDC.2
N$15
  Top 0.889: K4.2 44.45,59.69 39.37,64.77 39.37,71.12 | 39.37,71.12 39.37,73.59 Q4.3 | 39.37,71.12 36.83,73.66 | D7.A 36.83,73.66 | 36.83,73.66 36.83,78.52 LED7.C 36.61,80.23 TP21.TP
N$16  (1 unrouted)
  Top 0.508: R19.2 43.43,71.12 Q4.1 42.79,73.66 49.53,73.66 | 49.53,73.66 50.8,74.93 50.8,78.21 50.27,78.74 | TP2.TP 49.53,73.66
N$17
  Top 0.508: IC2.6 IC2.7 111.44,94.61 R5.1
  Top 0.889: R5.1 C7.1
N$18
  Top 0.889: R14.1 LED7.A
N$19
  Route2 2.54: EMSDC.4 EMSDC.3
N$20
  Top 0.508: R15.1 LED8.A
N$21
  Top 0.889: K4.4 38.1,50.8 78.74,50.8 K1.3
N$22
  Top 0.889: R20.2 LED1.A
N$23
  Top 0.508: R21.2 52.36,24.1 LED2.A
N$24
  Top 0.508: LED3.A R22.2
N$25
  Top 0.508: R7.2 LED4.A
N$26
  Top 0.508: R6.2 LED5.A
N$27  (via drill 0.35)
  Top 0.508: LED6.A v45.72,93.76 R8.2
N$28
  Top 0.508: IC2.2 98.42,94.61 97.16,93.34 96.52,93.34 | 92.96,93.34 92.96,95.18 R10.1 | 96.52,93.34 92.96,93.34 | 92.96,93.34 C8.1 | 96.52,93.34 96.52,91.88 R11.2
N$32
  Top 0.508: IC2.5 105.47,88.64 C6.1
OK_HS  (via drill 0.35)
  Top 0.508: TP10.TP 34.29,96.52 34.29,90.81 OK2.2 33.66,90.81 v33.02,90.17 | v48.26,30.48 102.98,30.48 108.85,24.61 110,24.61 123.19,11.43 138.45,11.43 ISOMETER_I/O.8
  Bottom 0.508: v33.02,90.17 33.02,74.77 14.46,56.2 14.46,54.28 15.24,53.5 15.24,36.83 21.59,30.48 v48.26,30.48
PRECHARGE_SELECT  (via drill 0.35)
  Top 0.508: v133.35,48.26 129.54,48.26 125.73,44.45 109.22,44.45 97.79,55.88 K2.5
  Top 0.889: K2.5 90.17,67.31 90.17,69.85 TP23.TP 95.25,69.85 | 95.25,69.85 95.25,74.71 LED1.C | 95.25,69.85 D1.A
  Bottom 0.508: BMS_I/O.7 153.69,48.26 v133.35,48.26
READY_POWER  (via drill 0.35, 0.35 layers 1-15)
  Top 0.889: F2.1 118.11,77.01 D2.2 118.42,70.81 121.92,67.31 127,67.31 139.85,54.46 BMS_POWER/GND.1 | v12.7,29.21 v12.7,31.75
  Route2 0.889: F2.1 43.29,78.74 37.23,84.8 35.85,84.8 29.09,91.56 THERAL_EX_I/O.1
  Route15 0.889: WIFI_I/O.1 16.49,16.51 13.97,16.51 12.7,17.78 v12.7,29.21
  Bottom 0.889: v12.7,31.75 12.7,60.96 12.7,64.77 24.13,76.2 24.13,90.17 22.74,91.56 THERAL_EX_I/O.1
STARTUP_RESET  (via drill 0.35, 0.65)
  Top 0.508: IC1.3 70.1,92.46 71.12,91.44 71.12,87.63 70.87,87.38 IC1.7 67.06,87.38 v66.04,86.36 | IC2.3 98.42,93.34 97.79,92.71 97.79,90.17 99.38,88.58 | 99.38,88.58 R9.2 | 99.38,88.58 97.79,88.58 v97.79,87.63
  Top 0.889: TP4.TP v91.44,83.82
  Bottom 0.508: v97.79,87.63 95.25,85.09 | v66.04,86.36 67.31,85.09 91.44,85.09 v91.44,83.82
  Bottom 0.61: 95.25,85.09 91.44,85.09
VDD  (via drill 0.35 layers 1-15, 0.5 pad 0.8 layers 1-15)
  Top 0.508: v74.93,96.52 75.59,95.86 | v80.01,86.36 80.01,86.89 80.75,87.63 | 55.35,85.09 v54.5,85.09
  Route15 0.508: 77.47,99.06 v74.93,96.52 73.66,97.79 58.42,97.79 50.8,90.17 50.8,89.83 50.69,89.73 50.69,89.01 54.56,85.14 v54.5,85.09 54.61,85.09 55.88,83.82 v55.88,82.55 | 90.17,99.06 93.98,95.25 93.98,90.17 90.17,86.36 v80.01,86.36
  Route15 0.889: 90.17,99.06 77.47,99.06
VSS  (via drill 0.35 layers 1-15, 0.5 pad 0.8 layers 1-15)
  Top 0.508: 63.13,94.35 63.13,94.75 v63.37,95 | 69.44,85.95 v68.58,85.09
  Top 0.61: 86.89,95.25 v88.9,95.25
  Route15 0.508: v45.72,74.93 50.8,74.93 57.15,81.28 57.15,83.82 51.44,89.53 52.07,90.17 55.88,90.17 60.96,85.09 v68.58,85.09 | v88.9,95.25 88.9,93.98 78.74,93.98 69.85,85.09 v68.58,85.09 | v63.37,95 63.75,95 64.77,93.98 64.64,93.98 63.37,92.71 63.37,90.3 v68.58,85.09